# Altium PCB 带继电器产品.PcbDoc
Units mil, origin at the board's own origin, x right, y up, seen from the top; angles counter-clockwise.
Board outline 3149.61 x 2362.2 mil, 2 copper layers (Top Layer, Bottom Layer); 149 components, 188 nets, 574 pads, 127 vias.
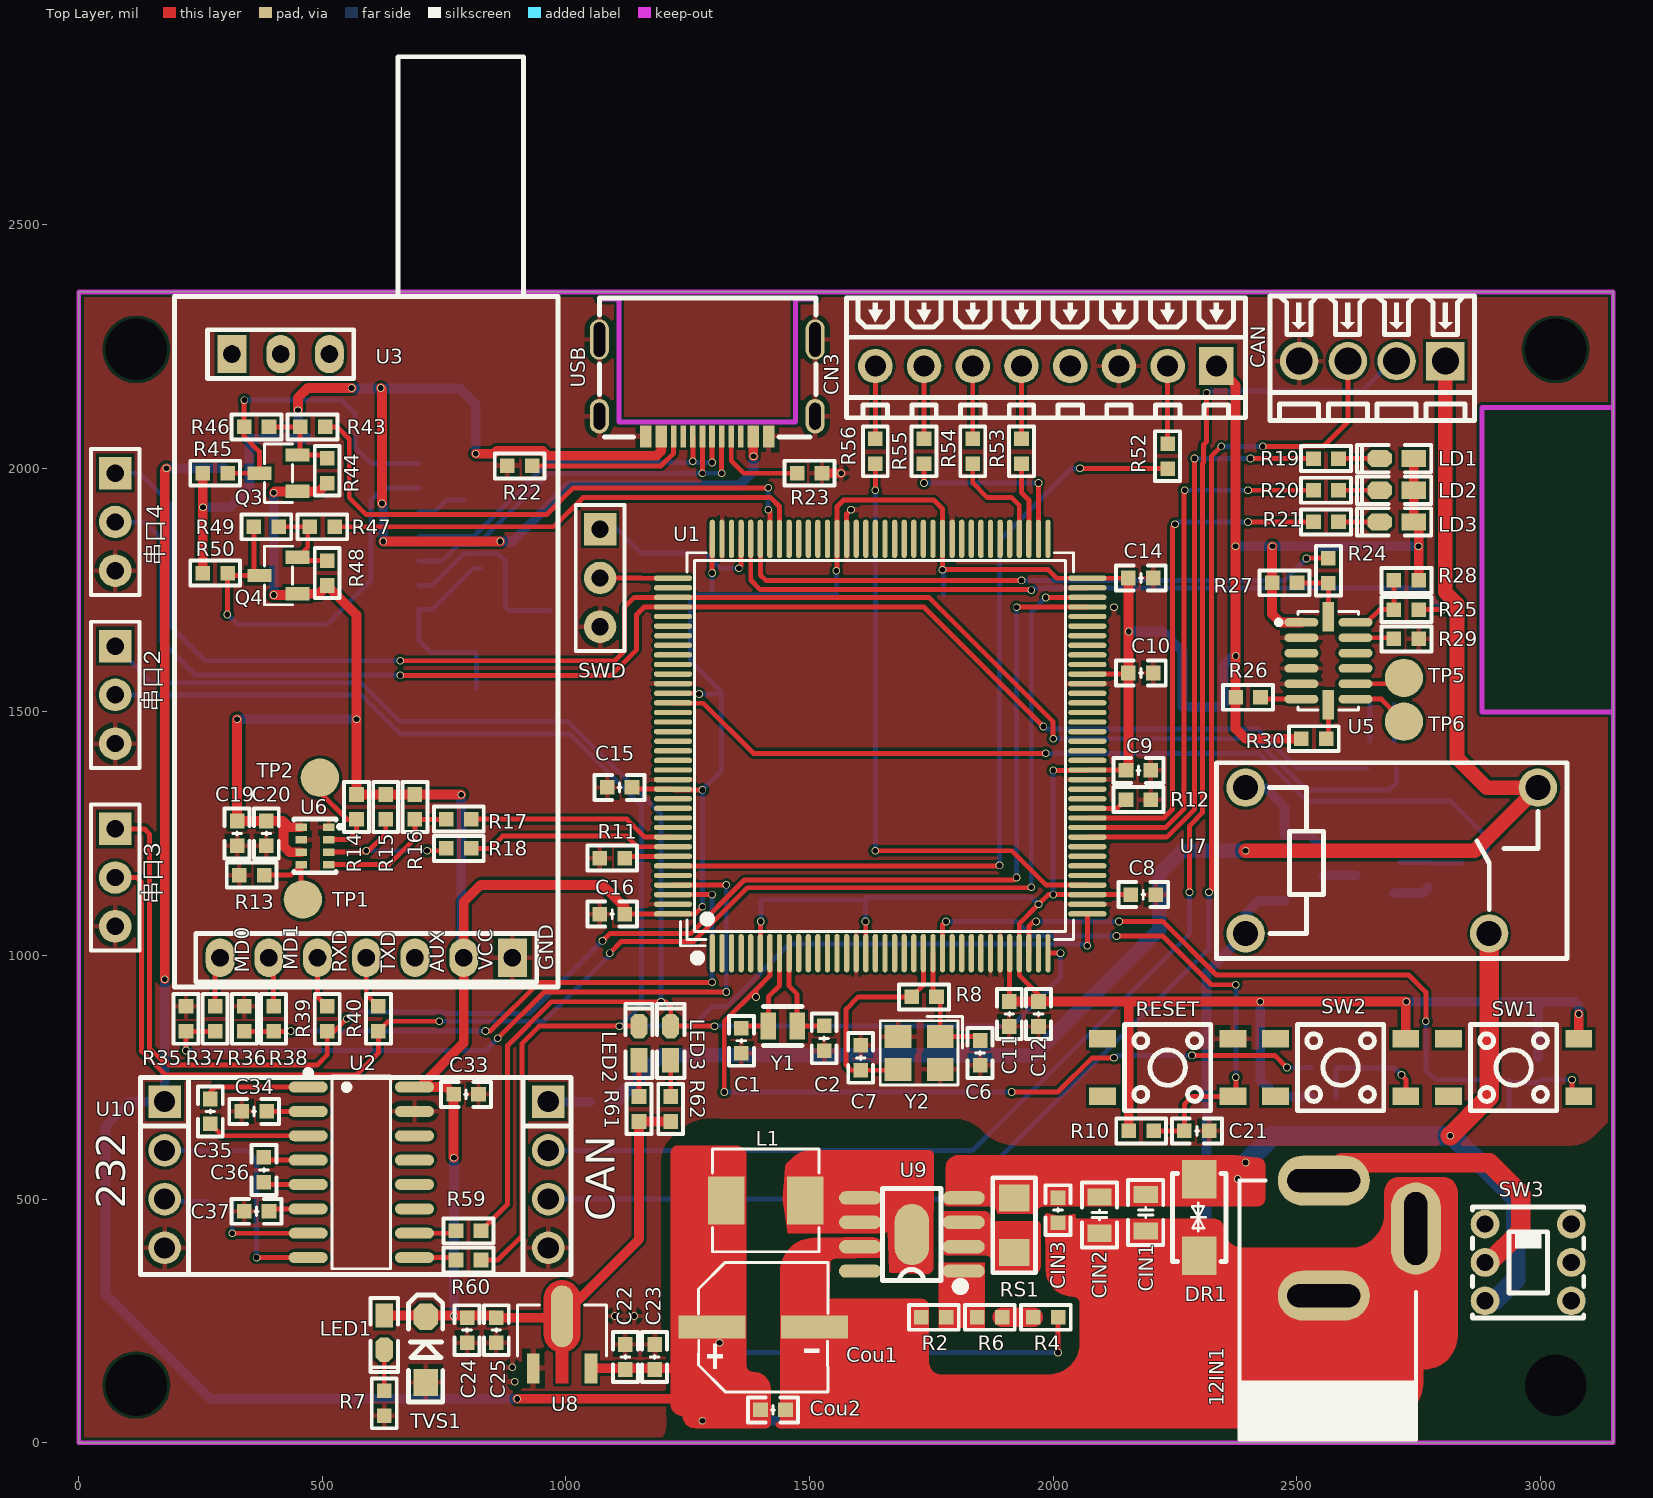
[diagram p0: Top Layer view]
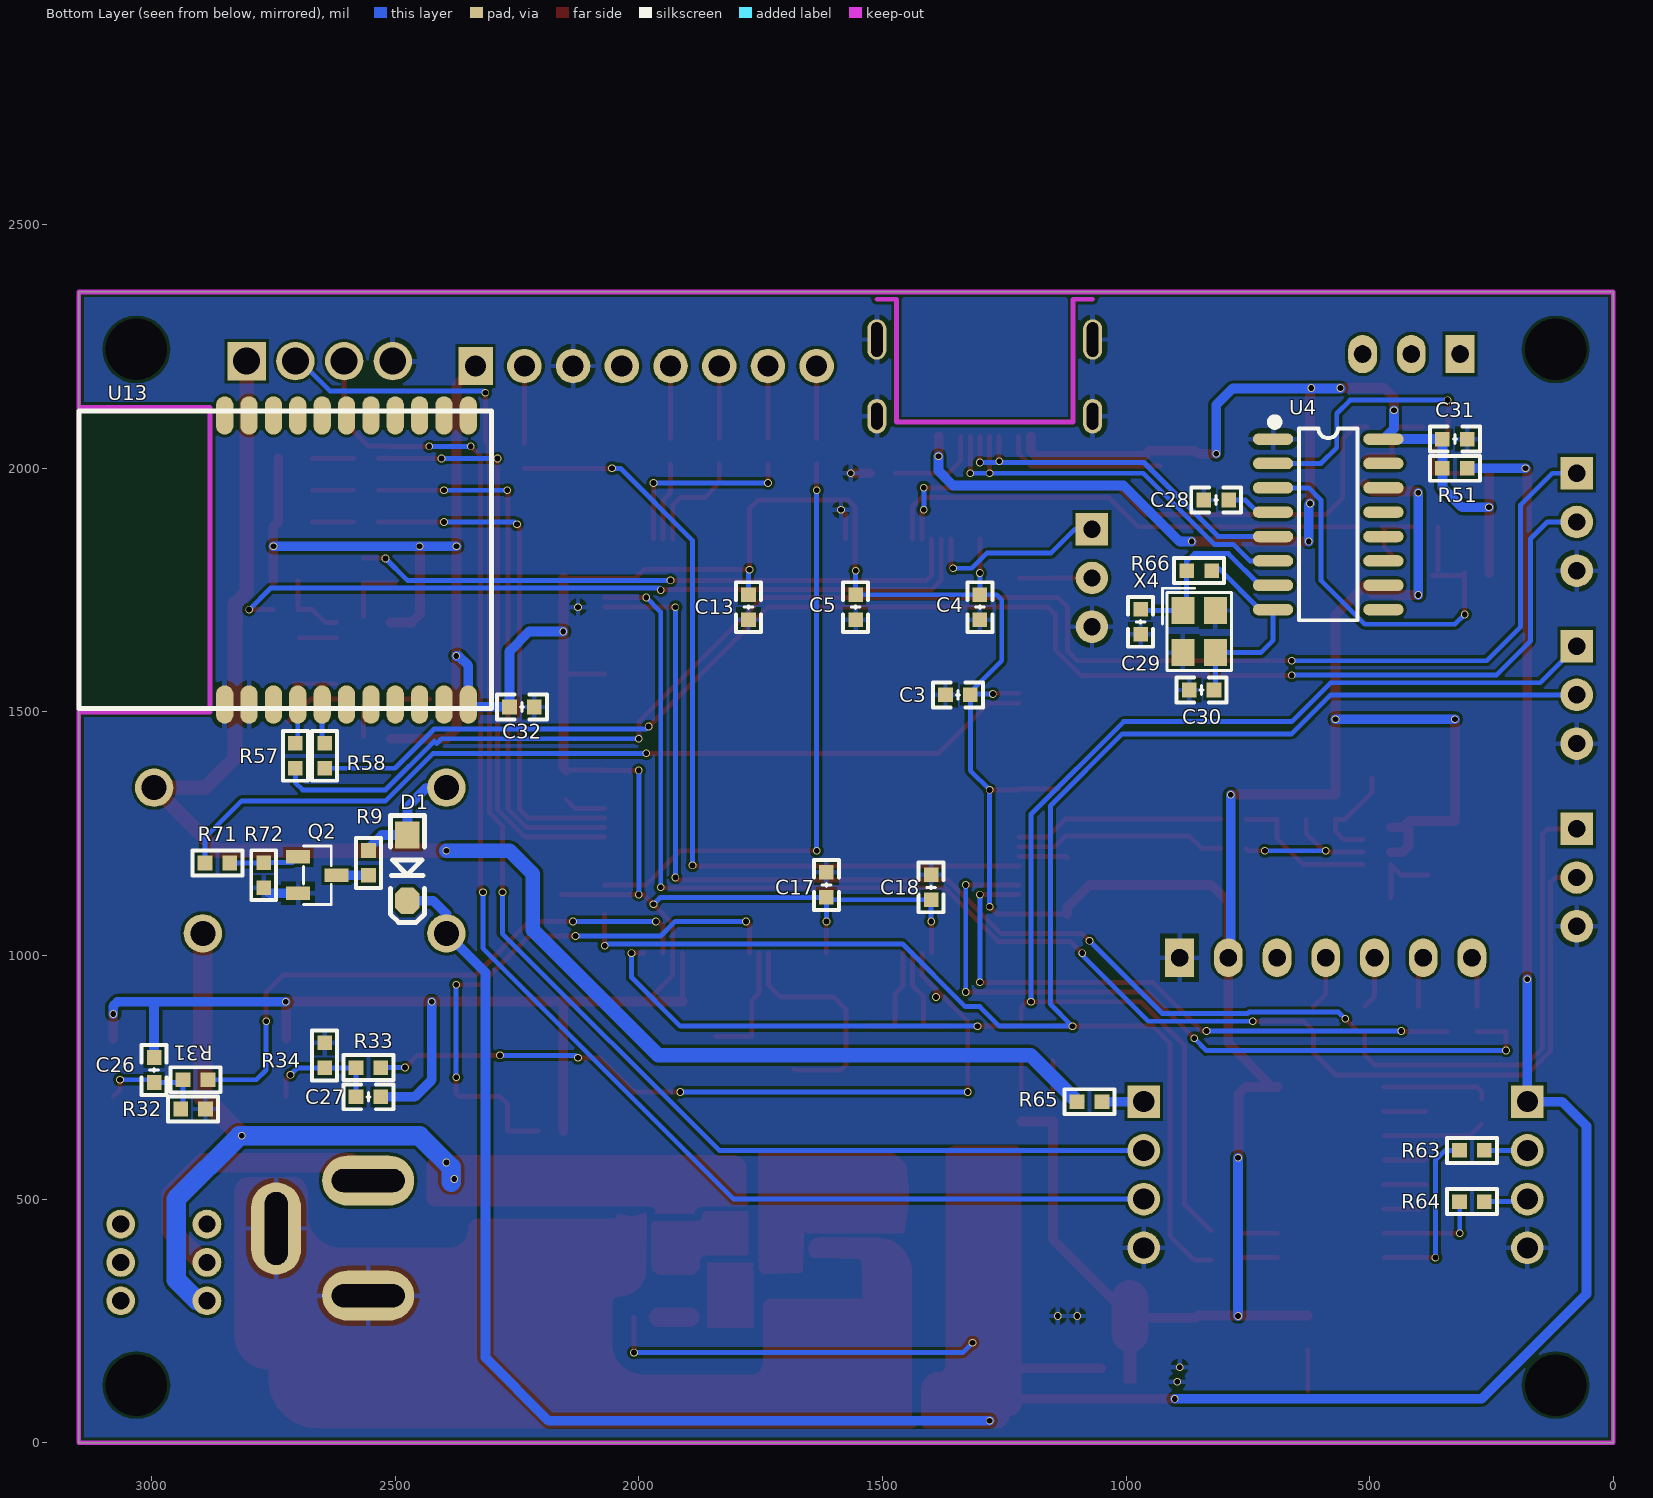
[diagram p1: Bottom Layer view, seen from below]

## Layer stack, top to bottom
Top Solder: solder mask 0.4, Solder Resist, Dk 3.5
Top Layer: signal copper 1.4
Dielectric 1: dielectric 12.6, FR-4, Dk 4.8
Bottom Layer: signal copper 1.4
Bottom Solder: solder mask 0.4, Solder Resist, Dk 3.5

## Board outline
0,0 3149.61,0 3149.61,2362.2 0,2362.2

## Design rules (kind name [scope] priority, off if disabled: settings)
Clearance [All] p1: gap=6
ComponentClearance [All] p1: gap=0 collisioncheckmode=3 verticalgap=0 showdistances=FALSE
PolygonConnect [All] p1: connectstyle=Relief reliefconductorwidth=10 reliefentries=4 polygonreliefangle="90 Angle" airgapwidth=10
RoutingVias [All] p1: holewidth=11.81 width=15.75 viastyle="Through Hole" minholewidth=11.81 minwidth=15.75 maxholewidth=11.81 maxwidth=15.75
SilkToSolderMaskClearance [IsPad] p1: minsilkscreentomaskgap=0 clearancetoexposedcopper=TRUE
SolderMaskExpansion [All] p1: expansion=4
Width [All] p1: maxlimit=40 minlimit=10 preferedwidth=10
27 further rules are at their usual default settings.

## Components (designator, comment, footprint, x,y, rotation, side; value= is the part's Value field where it differs from the comment)
12IN1 "HDR-1X3" DC-005 2650,420 r90 top
C1 "10P" C0603_L 1360,825 r90 top
C2 "10P" C0603_L 1530,830 r90 top
C3 "104" C0603_L 1345,1535 r180 bottom
C4 "10uF" C0603_L 1300,1715 r90 bottom
C5 "104" C0603_L 1555,1715 r90 bottom
C6 "22P" C0603_L 1850,800 r90 top
C7 "22P" C0603_L 1605,790 r270 top
C8 "104" C0603_L 2185,1125 r0 top
C9 "104" C0603_L 2175,1380 r0 top
C10 "104" C0603_L 2180,1580 r0 top
C11 "104" C0603_L 1910,880 r270 top
C12 "104" C0603_L 1970,880 r270 top
C13 "104" C0603_L 1775,1715 r270 bottom
C14 "104" C0603_L 2180,1775 r0 top
C15 "104" C0603_L 1110,1345 r180 top
C16 "104" C0603_L 1095,1085 r180 top
C17 "104" C0603_L 1615,1145 r90 bottom
C18 "104" C0603_L 1400,1140 r90 bottom
C19 "104" C0603_L 325,1250.59 r90 top
C20 "105" C0603_L 385,1250.59 r90 top
C21 "104" C0603_L 2295,640 r180 top
C22 "1uf" C0603_L 1122.01,175.99 r270 top
C23 "104" C0603_L 1182.01,175.99 r270 top
C24 "1uf" C0603_L 797.01,230.99 r90 top
C25 "104" C0603_L 857.01,230.99 r90 top
C26 "104" C0603_L 2995,765 r270 bottom
C27 "104" C0603_L 2555,710 r0 bottom
C28 "104" C0603_L 815,1935 r180 bottom
C29 "22p" C0603_L 970,1685 r90 bottom
C30 "22p" C0603_L 845,1545 r180 bottom
C31 "104" C0603_L 325,2060 r0 bottom
C32 "104" C0603_L 2240,1510 r180 bottom
C33 "0.22uf" C0603_L 795,715 r0 top
C34 "105" C0603_L 360,680 r0 top
C35 "0.22uf" C0603_L 270,680 r270 top
C36 "105" C0603_L 380,560 r270 top
C37 "105" C0603_L 365,475 r180 top
CAN "HDR-1X4" CAN/4P 2655,2220 r180 top
CIN1 "47uF/50VD6" C0805_L 2190,472.4 r270 top
CIN2 "47uF/50VD6" C0805_L 2095,467.4 r270 top
CIN3 "104" C0603_L 2010,477.4 r90 top
CN3 "SPI_RC522/C5188448" SPI/8P 1985,2210 r180 top
Cou1 "470uF/D6.3 L7.7/C2977552" D6.3/470uf 1405,237.4 r0 top
Cou2 "104" C0603_L 1425,67.4 r180 top
D1 "1n4148/sod123" SOD-123 2475,1180 r270 bottom
DR1 "SMAJ26CA/C7466479" TVS 2300,462.4 r270 top
L1 "68uH" 0530 1410,497.4 r0 top
LD1 "红色" LED0603_Y 2705,2020 r180 top
LD2 "红色" LED0603_Y 2705,1955 r180 top
LD3 "红色" LED0603_Y 2705,1890 r180 top
LED1 "红色" LED0603_Y 627.01,225.99 r270 top
LED2 "红色" LED0603_Y 1150,820 r90 top
LED3 "红色" LED0603_Y 1215,820 r90 top
Q2 "S9014" 9014 2660,1165 r0 bottom
Q3 "2N7002_C916396" 2N7002 410,1990 r0 top
Q4 "2N7002_C916396" 2N7002 410,1780 r0 top
R2 "10K" R0603_L 1755,257.4 r0 top
R4 "90K" R0603_L 1985,257.4 r0 top
R6 "90K" R0603_L 1870,257.4 r0 top
R7 "10K" R0603_L 627.01,80.99 r90 top
R8 "1M" R0603_L 1735,915 r180 top
R9 "510R" R0603_L 2555,1190 r270 bottom
R10 "10K" R0603_L 2180.59,640 r180 top
R11 "10K" R0603_L 1095,1200 r0 top
R12 "10K" R0603_L 2175,1320 r180 top
R13 "10K" R0603_L 355,1165 r0 top
R14 "10K" R0603_L 570,1305 r90 top
R15 "10K" R0603_L 630,1305 r90 top
R16 "10K" R0603_L 690,1305 r90 top
R17 "0R" R0603_L 780,1280 r180 top
R18 "0R" R0603_L 780,1220 r180 top
R19 "4.7K" R0603_L 2560,2020 r0 top
R20 "4.7K" R0603_L 2560,1955 r0 top
R21 "4.7K" R0603_L 2560,1890 r0 top
R22 "5.1K" R0603_L 905,2005 r0 top
R23 "5.1K" R0603_L 1500,1990 r0 top
R24 "0R" R0603_L 2565,1790 r270 top
R25 "0R" R0603_L 2725,1710 r180 top
R26 "0R" R0603_L 2400,1530 r180 top
R27 "10K" R0603_L 2475,1765 r180 top
R28 "10K" R0603_L 2725,1770 r0 top
R29 "0R" R0603_L 2725,1650 r180 top
R30 "10K" R0603_L 2535,1445 r180 top
R31 "1K" R0603_L 2910,745 r0 bottom
R32 "4.7K" R0603_L 2915,685 r0 bottom
R33 "1K" R0603_L 2555,770 r0 bottom
R34 "4.7K" R0603_L 2645,795 r270 bottom
R35 "10K" R0603_L 220,870 r90 top
R36 "10K" R0603_L 340,870 r90 top
R37 "0R" R0603_L 280,870 r90 top
R38 "0R" R0603_L 400,870 r90 top
R39 "0R" R0603_L 510,870 r90 top
R40 "0R" R0603_L 615,870 r90 top
R43 "0R" R0603_L 480,2085 r0 top
R44 "4.7k" R0603_L 510,1995 r270 top
R45 "4.7k" R0603_L 280,1990 r180 top
R46 "NC" R0603_L 365,2085 r0 top
R47 "0R" R0603_L 500,1880 r0 top
R48 "4.7k" R0603_L 510,1785 r270 top
R49 "NC" R0603_L 385,1880 r0 top
R50 "4.7k" R0603_L 280,1785 r180 top
R51 "NC/OR" R0603_L 325,2000 r180 bottom
R52 "0R" R0603_L 2235,2025 r270 top
R53 "0R" R0603_L 1935,2035 r270 top
R54 "0R" R0603_L 1835,2035 r270 top
R55 "0R" R0603_L 1735,2035 r270 top
R56 "0R" R0603_L 1635,2035 r270 top
R57 "0R" R0603_L 2705,1410 r90 bottom
R58 "0R" R0603_L 2645,1410 r90 bottom
R59 "0R" R0603_L 800,435 r180 top
R60 "0R" R0603_L 800,375 r180 top
R61 "4.7K" R0603_L 1150,685 r90 top
R62 "4.7K" R0603_L 1215,685 r90 top
R63 "0R" R0603_L 290,600 r180 bottom
R64 "0R" R0603_L 290,495 r180 bottom
R65 "0R" R0603_L 1075,700 r0 bottom
R66 "NC/1M" R0603_L 850,1790 r180 bottom
R71 "2K" R0603_L 2865,1190 r0 bottom
R72 "20K" R0603_L 2770,1165 r270 bottom
RESET "C963229" 按键4.5*4.5 2235,770 r180 top
RS1 "0.051R 2512" R1206_L 1920,447.4 r270 top
SW1 "C963229" 按键4.5*4.5 2945,770 r180 top
SW2 "C963229" 按键4.5*4.5 2590,770 r180 top
SW3 "PS-5850A-6PL/C963201" 电源开关 2975,370 r270 top
SWD "HDR-1X3" HDR2.54-LI-3P 1070,1775 r270 top
TP1 "SDO" 测试点 460,1115 r0 top
TP2 "CSB" 测试点 495,1365 r0 top
TP5 "IRQ" 测试点 2720,1570 r0 top
TP6 "IRQ" 测试点 2720,1480 r0 top
TVS1 "3.3V" SOD-123 712.01,190.99 r90 top
U1 "STM32F103ZET6" STME32F103ZET6 1645,1430 r0 top
U2 "SP3232EEN" max232 580,555 r270 top
U3 "无线通讯模块泽耀AS32-ttl-100-c" YAOZE 590,1615 r90 top
U4 "CH340G" SOP16_M 585,1885 r180 bottom
U5 "ADXL345BCCZ" ADXL345 2565,1605 r0 top
U6 "BMP280" BMP280 485,1225 r0 top
U7 "#NAME?" 继电器 2695,1195 r0 top
U8 "AMS1117-3.3V" 1117-3.3 992.01,205.99 r270 top
U9 "Component_1" H4025/9脚 1710,427.4 r180 top
U10 "232转CAN" CAN模块 570,550 r0 top
U13 "MK8000TR7" "MK8000 PCB_V1.0封装" 2350,1515 r90 bottom
USB "HC-TYPE-C-16P-C19274020" TYPEC 1290,2165 r180 top
X4 "12MHz/C9002/SMD3225" SMD3225 850,1665 r270 bottom
Y1 "32.768K/ C403709/SMD2012/2P" 32.768K 1445,855 r0 top
Y2 "8MHz/C2682774/SMD3225" SMD3225 1725,800 r180 top
串口2 "HDR-1X3" HDR2.54-LI-3P 74.94,1535 r270 top
串口3 "HDR-1X3" HDR2.54-LI-3P 74.94,1160 r270 top
串口4 "HDR-1X3" HDR2.54-LI-3P 74.94,1890 r270 top

## Footprints (in the part's own frame and the unit in brackets; to place one, negate y for a bottom-side part, rotate by r counter-clockwise, add the part's x,y. Pads: shape width x height; smd on the part's side, far side on the other; paste and mask are expansions set on the pad)
2N7002 [mm]
  rect 1.25x0.7 smd: 1(1,-0.95) 2(1,0.95) 3(-1,0)
  silkscreen extent -0.73,-1.53 0.73,1.53
32.768K [mm]
  rect 0.8x1.4 smd: 1(-0.75,0) 2(0.75,0)
  silkscreen extent -1.02,-1.02 1.02,1.02
0530 [mm]
  rect 1.9x2.5 smd mask+0.051: 1(2.05,0) 2(-2.05,0)
  silkscreen extent -2.78,-2.68 2.78,2.68
1117-3.3 [mm]
  rect 1.575x0.672 smd: 1(1.356,-1.5) 3(1.356,1.5)
  oval 3.226x1.14 smd: 2(-1.356,0)
  Top Layer region: -2.283,0.95 -0.429,0.95 -0.384,0.949 -0.34,0.946 -0.296,0.94 -0.252,0.933 -0.208,0.924 -0.165,0.912 -0.123,0.899 -0.081,0.884 -0.04,0.866 0,0.847 0.04,0.826 0.078,0.803 0.115,0.779 0.151,0.752 0.185,0.724 0.219,0.695 0.251,0.664 0.281,0.631 0.31,0.597 0.337,0.562 0.362,0.525 0.386,0.488 0.408,0.449 0.428,0.409 0.447,0.33 2.144,0.33 2.144,-0.33 0.447,-0.33 0.428,-0.409 0.408,-0.449 0.386,-0.488 0.362,-0.526 0.337,-0.562 0.31,-0.597 0.281,-0.631 0.251,-0.664 0.219,-0.695 0.185,-0.725 0.151,-0.753 0.115,-0.779 0.078,-0.804 0.04,-0.827 0,-0.848 -0.04,-0.867 -0.081,-0.884 -0.123,-0.899 -0.165,-0.913 -0.208,-0.924 -0.252,-0.934 -0.296,-0.941 -0.34,-0.946 -0.384,-0.949 -0.429,-0.95 -2.283,-0.95 -2.328,-0.949 -2.372,-0.946 -2.416,-0.941 -2.46,-0.934 -2.504,-0.924 -2.547,-0.913 -2.589,-0.899 -2.631,-0.884 -2.672,-0.867 -2.713,-0.848 -2.752,-0.827 -2.79,-0.804 -2.827,-0.779 -2.863,-0.753 -2.898,-0.725 -2.931,-0.695 -2.963,-0.664 -2.993,-0.631 -3.022,-0.597 -3.049,-0.562 -3.075,-0.526 -3.098,-0.488 -3.12,-0.449 -3.141,-0.409 -3.159,-0.369 -3.175,-0.327 -3.189,-0.285 -3.202,-0.242 -3.212,-0.199 -3.22,-0.155 -3.227,-0.111 -3.231,-0.067 -3.233,-0.022 -3.233,0.022 -3.231,0.067 -3.227,0.111 -3.22,0.155 -3.212,0.199 -3.202,0.242 -3.189,0.285 -3.175,0.327 -3.159,0.369 -3.141,0.409 -3.12,0.449 -3.098,0.488 -3.075,0.525 -3.049,0.562 -3.022,0.597 -2.993,0.631 -2.963,0.664 -2.931,0.695 -2.898,0.724 -2.863,0.752 -2.827,0.779 -2.79,0.803 -2.752,0.826 -2.713,0.847 -2.672,0.866 -2.631,0.884 -2.589,0.899 -2.547,0.912 -2.504,0.924 -2.46,0.933 -2.416,0.94 -2.372,0.946 -2.328,0.949
  silkscreen extent -1.95,-2.33 0.7,2.33
9014 [mm]
  rect 1.25x0.7 smd: 1(1,-0.95) 2(1,0.95) 3(-1,0)
  silkscreen extent -0.73,-1.53 0.73,1.53
ADXL345 [mm]
  oval 1.769x0.448 smd: 1(-1.409,2) 2(-1.409,1.2) 3(-1.409,0.4) 4(-1.409,-0.4) 5(-1.409,-1.2) 6(-1.409,-2) 8(1.409,-2) 9(1.409,-1.2) 10(1.409,-0.4) 11(1.409,0.4) 12(1.409,1.2) 13(1.409,2)
  rect 0.6x1.545 smd: 7(0,-2.297) 14(0,2.297)
  silkscreen extent -2.72,-2.58 1.58,2.58
BMP280 [mm]
  rect 0.6x0.4 smd: 1(0.725,0.975) 2(0.725,0.325) 3(0.725,-0.325) 4(0.725,-0.975) 5(-0.725,-0.975) 6(-0.725,-0.325) 7(-0.725,0.325) 8(-0.725,0.975)
  silkscreen extent -1.1,-1.4 1.4,1.4
C0603_L [mil] "无极性贴片电容"
  rect 30x30 smd: 1(-25.59,0) 2(25.59,0)
  silkscreen extent -51,-26 51,26, body extent -31,-16 31,16, height 32
C0805_L [mil] "无极性贴片电容"
  rect 35x50 smd: 1(-37.4,0) 2(37.4,0)
  silkscreen extent -67,-36 67,36, body extent -39,-24 39,24, height 20
CAN/4P [mm]
  rect 2x2 hole 1.4: 1(-3.81,0)
  round 2 hole 1.4: 2(-1.27,0) 3(1.27,0) 4(3.81,0)
  silkscreen extent -5.33,-3.4 5.33,3.1
CAN模块 [mm]
  rect 1.7x1.7 hole 1.1: 1(-10,3.81) 8(10,3.81)
  round 1.7 hole 1.1: 2(-10,1.27) 3(-10,-1.27) 4(-10,-3.81) 5(10,-3.81) 6(10,-1.27) 7(10,1.27)
  silkscreen extent -11.25,-5.21 11.19,5.08
D6.3/470uf [mm]
  rect 3.5x1.2 smd: 1(-2.67,0) 2(2.67,0)
  silkscreen extent -3.38,-3.38 3.38,3.38
DC-005 [mm] "J DC-005电源插座 封装规格:14.2X8.8mm"
  oval 2.6x4.8 hole 1.2 slot 3.8 at 90 deg: 1(3,2.4) 2(-3,2.4)
  oval 4.8x2.6 hole 1.2 slot 3.8 at 0 deg: 3(0.5,-2.4)
  silkscreen extent -10.5,-2.4 3,6.8, body extent -10.5,-2.4 3.55,6.9, height 11.2
H4025/9脚 [mm]
  oval 2.2x0.7 smd: 1(-2.7,1.905) 2(-2.7,0.635) 3(-2.7,-0.635) 4(-2.7,-1.905) 5(2.7,-1.905) 6(2.7,-0.635) 7(2.7,0.635) 8(2.7,1.905)
  oval 1.8x3.2 smd: 9(0,0)
  silkscreen extent -2.73,-2.4 1.54,2.91, body extent -3.1,-2.5 3.1,2.5, height 1.75
HDR2.54-LI-3P [mm] "排针，3脚"
  rect 1.7x1.7 hole 0.9: 1(-2.54,0)
  round 1.7 hole 0.9: 2(0,0) 3(2.54,0)
  silkscreen extent -3.81,-1.27 3.81,1.27, body extent -3.81,-1.27 3.81,1.27, height 8.5
LED0603_Y [mil] "黄色0603LED                              淘宝ID:黄晶宝石"
  rect 50x35 smd: 1(-35,0)
  oct 50x35 smd: 2(35,0)
  silkscreen extent -71,-28 81,28, body extent -32,-16 31,16, height 18
max232 [mil]
  oval 22.6x80.24 smd: 1(-175,-109.02) 2(-125,-109.02) 3(-75,-109.02) 4(-25,-109.02) 5(25,-109.02) 6(75,-109.02) 7(125,-109.02) 8(175,-109.02) 9(175,109.02) 10(125,109.02) 11(75,109.02) 12(25,109.02) 13(-25,109.02) 14(-75,109.02) 15(-125,109.02) 16(-175,109.02)
  silkscreen extent -210,-115 198,60
"MK8000 PCB_V1.0封装" [mm]
  oval 2x0.9 smd: 1(0,12.7) 2(0,11.43) 3(0,10.16) 4(0,8.89) 5(0,7.62) 6(0,6.35) 7(0,5.08) 8(0,3.81) 9(0,2.54) 10(0,1.27) 11(0,0) 12(15.075,0) 13(15.075,1.27) 14(15.075,2.54) 15(15.075,3.81) 16(15.075,5.08) 17(15.075,6.35) 18(15.075,7.62) 19(15.075,8.89) 20(15.075,10.16) 21(15.075,11.43) 22(15.075,12.7)
  silkscreen extent -0.2,-1.2 15.3,20.3
R0603_L [mil] "1/10W贴片电阻                 淘宝ID:黄晶宝石"
  rect 30x30 smd: 1(-25.59,0) 2(25.59,0)
  silkscreen extent -51,-26 51,26, body extent -31,-16 31,16, height 16
R1206_L [mil] "1/4W贴片电阻"
  rect 55x62 smd: 1(-55.12,0) 2(57.09,0)
  silkscreen extent -96,-44 98,44, body extent -63,-31 63,32, height 22
SMD3225 [mm]
  rect 1.4x1.2 smd: 1(-1.1,-0.85) 2(1.1,-0.85) 3(1.1,0.85) 4(-1.1,0.85)
  silkscreen extent -2.26,-1.91 2.03,1.68
SOD-123 [mil] "2.7x1.6X1.1mm（长宽高，不包括引脚） 淘宝ID:黄晶宝石"
  rect 55x50 smd: 1(-67.5,0)
  oct 55x50 smd: 2(67.5,0)
  silkscreen extent -108,-35 112,35, body extent -73,-31 73,31, height 48
SOP16_M [mm] "10.3*6.2*1.8mm（长宽高）封装库来自淘宝卖家 ID：黄晶宝石"
  oval 2.1x0.6 smd: 1(-2.875,4.445) 2(-2.875,3.175) 3(-2.875,1.905) 4(-2.875,0.635) 5(-2.875,-0.635) 6(-2.875,-1.905) 7(-2.875,-3.175) 8(-2.875,-4.445) 9(2.875,-4.445) 10(2.875,-3.175) 11(2.875,-1.905) 12(2.875,-0.635) 13(2.875,0.635) 14(2.875,1.905) 15(2.875,3.175) 16(2.875,4.445)
  silkscreen extent -2.95,-5 1.52,5.49, body extent -3,-5 3,5, height 1.9
SPI/8P [mm]
  rect 1.8x2 hole 1.1 paste+0 mask+0.05: 1(-8.89,0)
  round 1.8 hole 1.1 paste+0 mask+0.05: 2(-6.35,0) 3(-3.81,0) 4(-1.27,0) 5(1.27,0) 6(3.81,0) 7(6.35,0) 8(8.89,0)
  silkscreen extent -10.4,-3.56 10.4,2.7
STME32F103ZET6 [mm]
  oval 0.28x2 smd: 1(-8.75,-10.8) 2(-8.25,-10.8) 3(-7.75,-10.8) 4(-7.25,-10.8) 5(-6.75,-10.8) 6(-6.25,-10.8) 7(-5.75,-10.8) 8(-5.25,-10.8) 9(-4.75,-10.8) 10(-4.25,-10.8) 11(-3.75,-10.8) 12(-3.25,-10.8) 13(-2.75,-10.8) 14(-2.25,-10.8) 15(-1.75,-10.8) 16(-1.25,-10.8) 17(-0.75,-10.8) 18(-0.25,-10.8) 19(0.25,-10.8) 20(0.75,-10.8) 21(1.25,-10.8) 22(1.75,-10.8) 23(2.25,-10.8) 24(2.75,-10.8) 25(3.25,-10.8) 26(3.75,-10.8) 27(4.25,-10.8) 28(4.75,-10.8) 29(5.25,-10.8) 30(5.75,-10.8) 31(6.25,-10.8) 32(6.75,-10.8) 33(7.25,-10.8) 34(7.75,-10.8) 35(8.25,-10.8) 36(8.75,-10.8) 73(8.75,10.8) 74(8.25,10.8) 75(7.75,10.8) 76(7.25,10.8) 77(6.75,10.8) 78(6.25,10.8) 79(5.75,10.8) 80(5.25,10.8) 81(4.75,10.8) 82(4.25,10.8) 83(3.75,10.8) 84(3.25,10.8) 85(2.75,10.8) 86(2.25,10.8) 87(1.75,10.8) 88(1.25,10.8) 89(0.75,10.8) 90(0.25,10.8) 91(-0.25,10.8) 92(-0.75,10.8) 93(-1.25,10.8) 94(-1.75,10.8) 95(-2.25,10.8) 96(-2.75,10.8) 97(-3.25,10.8) 98(-3.75,10.8) 99(-4.25,10.8) 100(-4.75,10.8) 101(-5.25,10.8) 102(-5.75,10.8) 103(-6.25,10.8) 104(-6.75,10.8) 105(-7.25,10.8) 106(-7.75,10.8) 107(-8.25,10.8) 108(-8.75,10.8)
  oval 2x0.28 smd: 37(10.8,-8.75) 38(10.8,-8.25) 39(10.8,-7.75) 40(10.8,-7.25) 41(10.8,-6.75) 42(10.8,-6.25) 43(10.8,-5.75) 44(10.8,-5.25) 45(10.8,-4.75) 46(10.8,-4.25) 47(10.8,-3.75) 48(10.8,-3.25) 49(10.8,-2.75) 50(10.8,-2.25) 51(10.8,-1.75) 52(10.8,-1.25) 53(10.8,-0.75) 54(10.8,-0.25) 55(10.8,0.25) 56(10.8,0.75) 57(10.8,1.25) 58(10.8,1.75) 59(10.8,2.25) 60(10.8,2.75) 61(10.8,3.25) 62(10.8,3.75) 63(10.8,4.25) 64(10.8,4.75) 65(10.8,5.25) 66(10.8,5.75) 67(10.8,6.25) 68(10.8,6.75) 69(10.8,7.25) 70(10.8,7.75) 71(10.8,8.25) 72(10.8,8.75) 109(-10.8,8.75) 110(-10.8,8.25) 111(-10.8,7.75) 112(-10.8,7.25) 113(-10.8,6.75) 114(-10.8,6.25) 115(-10.8,5.75) 116(-10.8,5.25) 117(-10.8,4.75) 118(-10.8,4.25) 119(-10.8,3.75) 120(-10.8,3.25) 121(-10.8,2.75) 122(-10.8,2.25) 123(-10.8,1.75) 124(-10.8,1.25) 125(-10.8,0.75) 126(-10.8,0.25) 127(-10.8,-0.25) 128(-10.8,-0.75) 129(-10.8,-1.25) 130(-10.8,-1.75) 131(-10.8,-2.25) 132(-10.8,-2.75) 133(-10.8,-3.25) 134(-10.8,-3.75) 135(-10.8,-4.25) 136(-10.8,-4.75) 137(-10.8,-5.25) 138(-10.8,-5.75) 139(-10.8,-6.25) 140(-10.8,-6.75) 141(-10.8,-7.25) 142(-10.8,-7.75) 143(-10.8,-8.25) 144(-10.8,-8.75)
  silkscreen extent -10.41,-11.25 10.08,10.08
TVS [mm]
  rect 2x1.8 smd: 1(-2,0) 2(2,0)
  silkscreen extent -2.3,-1.4 2.3,1.4
TYPEC [mm]
  oval 1x1.8 hole 0.6 slot 1.4 at 90 deg: 12(-5.625,1.475)
  oval 1x1.8 hole 0.6 slot 1.4 at 90 deg copper offset 0,0: 13(5.625,1.475)
  oval 1x2.1 hole 0.6 slot 1.8 at 90 deg: 14(-5.625,-2.525)
  oval 1x2.1 hole 0.6 slot 1.8 at 90 deg copper offset 0,0: 15(5.625,-2.525)
  rect 0.6x1.15 smd paste+0 mask+0.05: A1B12(-3.2,2.525) A4B9(-2.4,2.525) A9B4(2.4,2.525) A12B1(3.2,2.525)
  rect 0.3x1.15 smd paste+0 mask+0.05: A5(-1.25,2.525) A6(-0.25,2.525) A7(0.25,2.525) A8(1.25,2.525) B5(1.75,2.525) B6(0.75,2.525) B7(-0.75,2.525) B8(-1.75,2.525)
  Keep-Out Layer lines w0.254: 4.6,-1.397 4.6,1.778 4.6,-1.397 ; 4.6,-1.397 4.6,-4.625 ; 4.6,-1.397 4.6,-4.625 ; 4.6,-4.625 5.625,-4.625 4.6,-4.625 ; -4.6,1.778 -4.6,-1.494 -4.6,1.778 ; -4.6,1.778 4.572,1.778 -4.6,1.778 ; -4.6,-4.625 -4.6,-1.397 -4.6,-4.625 ; -4.6,-4.625 -5.625,-4.625 -4.6,-4.625
  silkscreen extent -5.68,-4.68 5.62,2.55
YAOZE [mm]
  rect 2x1.5 hole 0.9 slot 0.905 at 0 deg: 1(-15.736,-7.62) 10(15.736,7)
  oval 2x1.5 hole 0.9 slot 0.905 at 0 deg: 2(-15.736,-5.08) 3(-15.736,-2.54) 4(-15.736,0) 5(-15.736,2.54) 6(-15.736,5.08) 7(-15.736,7.62) 8(15.736,1.92) 9(15.736,4.46)
  silkscreen extent -17.26,-10 31.24,10
按键4.5*4.5 [mm]
  rect 1.4x0.9 smd: 1(-3.4,1.5) 2(3.4,1.5) 3(-3.4,-1.5) 4(3.4,-1.5)
  silkscreen extent -2.25,-2.25 2.25,2.25
测试点 [mm]
  round 2 smd: 1(0,0)
电源开关 [mm]
  round 1.5 hole 0.9 paste+0 mask+0.05: 1(-2,-2.25) 2(0,-2.25) 3(2,-2.25) 4(-2,2.25) 5(0,2.25) 6(2,2.25)
  silkscreen extent -2.9,-2.9 2.9,2.9
继电器 [mm]
  round 2 hole 1.3: 1(-7.62,3.8) 3(7.62,3.8) 4(5.08,-3.8) 5(-7.62,-3.8)
  silkscreen extent -9.14,-5.1 9.14,5.1

## Part data
12IN1 SWD 串口2 串口3 串口4: library part "Header 3", "3P接插件"
C1 C2 C3 C4 C5 C6 C7 C8 C9 C10 C11 C12 C13 C14 C15 C16 C17 C18 C19 C20 C21: library part C
C22 C23 C24 C25 C26 C27 C28 C29 C30 C31 C32: library part C, "无极性贴片电容"
C33 C34 C35 C36 C37: library part CAP, "Capacitor"
CAN: library part "Header 4", "4P接插件"
CIN1 CIN2 Cou1: library part CE, "直插电解电容"
CIN3 Cou2: library part C, "贴片电容"
CN3: library part SPI_RC522
D1: library part 1N4007, "整流二极管"
DR1: library part DR, "瞬态电压抑制二极管"
L1: library part L, "小功率贴片电感"
LD1 LD2 LD3 LED1 LED2 LED3: library part LED-SMD, "贴片LED"
Q2: library part S9014_C2148
R2 R4 R6 R7 R9 R19 R20 R21 R22 R23 R31 R32 R33 R34 R43 R44 R45 R46 R47 R48 R49 R50 R51 R63 R64 R65 R66 RS1: library part R, "贴片电阻"
R8 R10 R11 R12 R13 R14 R15 R16 R17 R18 R59 R60 R61 R62 R71 R72: library part R
R24 R25 R26 R27 R28 R29 R30 R35 R36 R37 R38 R39 R40 R52 R53 R54 R55 R56 R57 R58: library part RES2
RESET SW1 SW2: library part KH-6X6X15H-TJ-FS
SW3: library part PS-5850A-6PL
TP1 TP2 TP5 TP6: library part "TEST TP", "测试环"
TVS1: library part 1N4102, "8.7V/0.5W稳压管"
U3 U10: library part Component_1
U4: "串口转USB"
U7: library part YX201-S-105DM
U8: library part AMS1117, "三端稳压芯片"
USB: library part HC-TYPE-C-16P-C08B
X4 Y2: library part X32258MSB4SI
Y1: library part XTAL_1, "Crystal Oscillator"

## Free pads (board coordinates)
  round 60 hole 125.98: 0(118.11,118.11) 0(118.11,2244.09) 0(3031.5,118.11) 0(3031.5,2244.09)

## Via types
v1: diameter 15.75, hole 11.81, Top Layer to Bottom Layer, 127 vias

## Nets (pads, with @x,y where several pads share a name; then routed paths per layer and width w, separated by ;. In a path a pad name is that pad's centre, name@x,y a point inside that pad or via, vN(x,y) a via of type N, cw(c..) or ccw(c..) an arc to the next point about the centre after c; other vN are vias at no path point)
5V: C22.2 C23.2 Cou1.1 Cou2.2 D1.2 L1.2 R4.2 R51.2 U7.5 U8.3 U10.1 | length 6419
  Top Layer w10: Cou1.1@1299.89,220.11 v1(1315,205) ; v1(2010,185) 2010,256.8 R4.2
  Top Layer w20: v1(176.3,951.3) 176.3,1996.3 v1(180,2000) ; v1(900,90) 1265,90 ; U8.3 1227.6,152.6 1299.89,224.89 Cou1.1
  Bottom Layer w10: v1(1315,205) 1335,185 v1(2010,185)
  Bottom Layer w20: v1(176.3,951.3) U10.1 105,700 55,650 55,305 270,90 v1(900,90) ; v1(180,2000) R51.2 ; v1(1280,45) 2185,45 2315,175 2315,965.4 U7.5 2395,1085 2422.5,1112.5 D1.2
12V_OUT: CAN.1 R65.2 U7.3 | length 3244.2
  Top Layer w30: v1(2395,1215) 2865.4,1215 U7.3 2890.4,1344.6 2828.87,1406.13 2828.87,1721.96 2805,1745.83 CAN.1
  Bottom Layer w30: R65.2 1195.58,795 1960,795 2217.5,1052.5 2217.5,1167.5 2265,1215 v1(2395,1215)
BOOT0: R11.2 U1.138 | length 100.7
  Top Layer w10: R11.2 1124.21,1203.62 U1.138
BOOT1: R12.2 U1.48 | length 86.6
  Top Layer w10: U1.48 2131.46,1302.05 R12.2
CANH: CAN.2 U10.7 | length 3042
  Top Layer w10: v1(2280,1130) 2280,1266 2295,1281 2295,1282.12 2306.25,1293.37 2306.25,2009.56 2308.87,2012.18 2308.87,2048.87 2315,2055 v1(2315,2155)
  Bottom Layer w10: U10.7 1835,600 2280,1045 v1(2280,1130) ; v1(2315,2155) 2318.87,2158.87 2634.23,2158.87 2695.36,2220 CAN.2
CANL: CAN.3 U10.6 | length 3015.7
  Top Layer w10: v1(2320,1130) 2324.87,1134.87 2324.87,2024.87 v1(2345,2045) ; v1(2430,2045) 2513.85,2045 2514.85,2046 2556,2046 2605,2095 CAN.3
  Bottom Layer w10: U10.6 1805,500 2320,1015 v1(2320,1130) ; v1(2345,2045) v1(2430,2045)
CSB: R14.1 TP2.1 U6.2 | length 216
  Top Layer w10: TP2.1 495,1335 550.59,1279.41 R14.1 570,1255 552.79,1237.79 U6.2
D+: U4.5 USB.A6 USB.B6 | length 773.4
  Top Layer w10: v1(1260.47,2014.53) USB.B6 ; USB.A6 1299.84,2010.16 1300,2010 v1(1300,2011.92)
  Bottom Layer w10: U4.5 811.15,1860 963.08,2011.92 v1(1300,2011.92)
D-: U4.6 USB.A7 USB.B7 | length 847.8
  Top Layer w10: v1(1280,1990) 1280,2065.43 USB.A7 ; USB.B7 1319.53,2045.47 1319.53,1990.47 v1(1320,1990)
  Bottom Layer w10: U4.6 746,1810 780,1844 819,1844 965,1990 v1(1280,1990) v1(1320,1990)
FIFO_RCLK: U1.134
FIFO_WEN: U1.133
GBC_KEY: R56.2 U1.40 | length 1258.8
  Top Layer w10: v1(1635,1215) 1915,1215 1985.43,1144.57 U1.40 ; v1(1635,1955) R56.2
  Bottom Layer w10: v1(1635,1215) v1(1635,1955)
GBC_LED: U1.110
GBC_RX: R39.1 U1.69 串口3.1 | length 3199.3
  Top Layer w10: 串口3.1 135,1260 145,1250 145,810 170,785 176,785 186,775 489,775 510,796 R39.1 524.41,844.41 v1(550,870) ; v1(1075,1030) 1090,1045 1255.83,1045 1365.83,1155 1920,1155 v1(1925,1160) ; v1(1925,1715) 2069.77,1715 U1.69
  Bottom Layer w10: v1(550,870) 563.87,883.87 747.82,883.87 750.69,881 926,881 v1(1075,1030) ; v1(1925,1160) v1(1925,1715)
GBC_TX: R40.1 U1.70 串口3.2 | length 3137
  Top Layer w10: 串口3.2 119,1160 129,1150 129,803.37 177.37,755 570,755 615,800 R40.1 635.6,865 v1(740,865) ; v1(1090,1005) 1114,1029 1262.46,1029 1372.46,1139 1954,1139 v1(1955,1140) ; v1(1985,1735) 2070.08,1735 U1.70
  Bottom Layer w10: v1(740,865) 954,865 1094,1005 v1(1090,1005) ; v1(1955,1140) 1955,1705 v1(1985,1735)
GND: 12IN1.2 12IN1.3 C1.1 C2.1 C3.1 C4.1 C5.1 C6.1 C7.1 C8.2 C9.2 C10.2 C11.2 C12.2 C13.2 C14.2 C15.2 C16.2 C17.2 C18.2 C19.1 C20.1 C21.1 C22.1 C23.1 C24.1 C25.1 C28.1 C29.1 C30.1 C31.1 C32.2 C33.2 C34.1 C37.2 CAN.4 CIN1.2 CIN2.2 CIN3.1 CN3.3 Cou1.2 Cou2.1 DR1.2 Q2.2 R2.1 R7.1 R11.1 R12.1 R13.1 R22.1 R23.2 R29.1 R32.1 R34.1 R35.2 R36.2 R72.2 RESET.3 SWD.3 TVS1.1 U1.16 U1.30 U1.31 U1.38 U1.51 U1.61 U1.71 U1.83 U1.94 U1.107 U1.120 U1.130 U1.143 U2.15 U3.1 U4.1 U5.2 U5.4 U5.5 U6.1 U6.7 U8.1 U9.7 U10.4 U10.5 U13.1 U13.2 USB.12 USB.13 USB.14 USB.15 USB.A1B12 USB.A12B1 X4.2 X4.4 Y2.2 Y2.4 串口2.3 串口3.3 串口4.3 | length 178.4
  Top Layer w10: U1.94 1576.1,1906.1 v1(1585,1915)
  Top Layer w20: R23.2 v1(1565,1990)
  Bottom Layer w20: Q2.2 2758.19,1127.6 R72.2
  other v1: 895,125 890,155 1100,260 1140,260 2125,1715
IIC_SCL: R17.1 U1.136 | length 429.5
  Top Layer w10: R17.1 1125,1280 1162.01,1242.99 U1.136
IIC_SDA: R18.1 U1.137 | length 433.5
  Top Layer w10: R18.1 845,1220 870,1245 1125,1245 1146.69,1223.31 U1.137
INT1_345: TP6.1 U5.8 | length 118.7
  Top Layer w10: U5.8 2673.74,1526.26 TP6.1
INT2_345: TP5.1 U5.9 | length 87.3
  Top Layer w10: U5.9 TP5.1@2707.76,1557.76
LCD_BL: R20.1 U1.46 | length 1133.3
  Top Layer w10: U1.46 2230.31,1262.68 2268.87,1301.25 2268.87,1953.87 v1(2270,1955) ; v1(2400,1955) R20.1
  Bottom Layer w10: v1(2270,1955) v1(2400,1955)
LED0: U1.135
NetC1_2: C1.2 U1.8 Y1.1 | length 210.3
  Top Layer w10: C1.2@1364.42,855 Y1.1 1415.47,915.47 1438.31,938.31 U1.8
NetC2_2: C2.2 U1.9 Y1.2 | length 211.5
  Top Layer w10: U1.9 1457.99,937.01 1474.53,920.47 Y1.2 C2.2@1529.42,855
NetC6_2: C6.2 R8.1 U1.24 Y2.1 | length 251.4
  Top Layer w10: U1.24 1753.27,922.33 R8.1 1768.31,907.29 Y2.1 C6.2@1842.13,833.46
NetC7_2: C7.2 R8.2 U1.23 Y2.3 | length 471.5
  Top Layer w10: Y2.3 1679.57,764.41 C7.2 1585.59,764.41 1575,775 1575,890 1600,915 R8.2 1733.58,939.17 U1.23
NetC26_2: C26.2 R31.2 R32.2 SW1.1 | length 237.6
  Top Layer w10: v1(3065,745) 3065,724.81 SW1.1
  Bottom Layer w10: R32.2 cw(c2940.59,690) 2935.59,690 R31.2 ccw(c2941.18,745) 2941.18,739.41 C26.2 3000.59,745 v1(3065,745)
NetC27_2: C27.2 R33.2 R34.2 SW2.1 | length 248.1
  Top Layer w10: v1(2715,755) 2723.86,746.14 SW2.1
  Bottom Layer w10: C27.2 R33.2@2580.59,769.41 ; R33.2 R33.2@2580.59,769.41 ; v1(2715,755) 2700.59,769.41 R34.2 R33.2@2580.59,769.41
NetC28_2: C28.2 U4.4 | length 101.6
  Bottom Layer w10: U4.4 730,1910 755,1935 C28.2
NetC29_2: C29.2 R66.1 U4.7 X4.1 | length 399.4
  Bottom Layer w10: U4.7 725,1760 790,1825 860,1825 875.59,1809.41 R66.1 875.59,1716.18 X4.1 C29.2@967.72,1708.31
NetC30_2: C30.2 R66.2 U4.8 X4.3 | length 427.2
  Bottom Layer w10: C30.2@816.54,1547.87 X4.3 723.31,1621.69 698.19,1646.81 U4.8 725,1710 810,1795 R66.2@824.41,1795
NetC34_2: C34.2 U2.2 | length 85.4
  Top Layer w10: C34.2 U2.2
NetC35_1: C35.1 U2.1 | length 219.5
  Top Layer w10: C35.1 270,720 280,730 U2.1
NetC35_2: C35.2 U2.3 | length 211.1
  Top Layer w10: C35.2 294.41,630 U2.3
NetC36_1: C36.1 U2.4 | length 85.4
  Top Layer w10: C36.1@385.59,580 U2.4
NetC36_2: C36.2 U2.5 | length 86.6
  Top Layer w10: C36.2@384.41,530 U2.5
NetC37_1: C37.1 U2.6 | length 75.4
  Top Layer w10: C37.1@395.59,480 U2.6
NetCN3_2: CN3.2 R52.1 | length 159.4
  Top Layer w10: R52.1 CN3.2
NetCN3_5: CN3.5 R53.1 | length 149.4
  Top Layer w10: R53.1 CN3.5
NetCN3_6: CN3.6 R54.1 | length 149.4
  Top Layer w10: R54.1 CN3.6
NetCN3_7: CN3.7 R55.1 | length 149.4
  Top Layer w10: R55.1 CN3.7
NetCN3_8: CN3.8 R56.1 | length 149.4
  Top Layer w10: R56.1 CN3.8
NetD1_1: D1.1 R9.1 U7.1 | length 249.7
  Bottom Layer w20: U7.1 2435.4,1344.6 2475,1305 D1.1 2527.5,1247.5 2555,1220 R9.1
NetL1_1: L1.1 U9.5 U9.6 U9.9
NetLD1_2: LD1.2 R19.2 | length 84.4
  Top Layer w10: R19.2 LD1.2
NetLD2_2: LD2.2 R20.2 | length 84.4
  Top Layer w10: R20.2 LD2.2
NetLD3_2: LD3.2 R21.2 | length 84.4
  Top Layer w10: R21.2 LD3.2
NetLED1_2: LED1.2 R7.2 | length 84.4
  Top Layer w10: R7.2 LED1.2
NetLED2_1: LED2.1 R61.2 | length 74.4
  Top Layer w10: R61.2 LED2.1
NetLED3_1: LED3.1 R62.2 | length 74.4
  Top Layer w10: R62.2 LED3.1
NetQ2_1: Q2.1 R71.1 R72.1 | length 127.6
  Bottom Layer w10: Q2.1@2711.18,1190.59 R72.1 ; R72.1@2770.59,1190 R71.1
NetQ2_3: Q2.3 R9.2 | length 65.9
  Bottom Layer w20: R9.2 2555.59,1165 Q2.3
NetR2_2: R2.2 R6.1 U9.1
NetR4_1: R4.1 R6.2 | length 63.8
  Top Layer w40: R6.2 R4.1
NetR22_2: R22.2 USB.B5 | length 335.8
  Top Layer w10: R22.2 1195,2005 1221.11,2031.11 USB.B5
NetR23_1: R23.1 USB.A5 | length 195.7
  Top Layer w10: USB.A5 1339.22,2015.78 1365,1990 R23.1
NetR26_1: R26.1 U5.6 | length 80.2
  Top Layer w10: R26.1@2429.34,1526.26 U5.6
NetR30_1: R30.1 U5.7 | length 65.1
  Top Layer w10: R30.1@2565,1449.41 U5.7
NetR37_2: R37.2 U3.7 | length 104
  Top Layer w10: R37.2 280,985.48 U3.7
NetR38_2: R38.2 U3.6 | length 104
  Top Layer w10: U3.6 400,985.47 R38.2
NetR39_2: R39.2 U3.5 | length 108.2
  Top Layer w10: U3.5 490,915.59 R39.2
NetR40_2: R40.2 U3.4 | length 110.2
  Top Layer w10: U3.4 590,920.59 R40.2
NetR57_2: R57.2 U13.4 | length 74.4
  Bottom Layer w10: R57.2@2700,1440.58 U13.4
NetR58_2: R58.2 U13.5 | length 74.4
  Bottom Layer w10: R58.2@2650,1440.59 U13.5
NetR59_2: R59.2 U2.10 | length 80.4
  Top Layer w10: U2.10 R59.2@769.41,430
NetR60_2: R60.2 U2.9 | length 80.4
  Top Layer w10: U2.9 R60.2@769.42,380
NetR63_2: R63.2 U10.2 | length 88.1
  Bottom Layer w10: U10.2 R63.2
NetR64_2: R64.2 U10.3 | length 83.1
  Bottom Layer w10: U10.3@181.3,495 R64.2
NetR65_1: R65.1 U10.8 | length 85.7
  Bottom Layer w20: U10.8 R65.1
NetRS1_2: RS1.2 U9.2 U9.3
OV_VSYNC: U1.100
PA0: R31.1 U1.34 | length 1222
  Top Layer w10: U1.34 1950.12,1060.12 1960,1070 v1(1965,1070) ; v1(2135,1070) 2225,1070 2335,960 2730,960 2765,925 v1(2765,865)
  Bottom Layer w10: v1(1965,1070) v1(2135,1070) ; v1(2765,865) 2765,765 2785,745 R31.1
PA1: U1.35
PA2: LED3.2 R59.1 U1.36 串口2.1 | length 3376
  Top Layer w10: R59.1 880,489.41 880,815 970,905 v1(1195,905) 1205,905 1215,895 LED3.2@1215,870 ; LED3.2 v1(1305,855) ; U1.36 2014.8,1004.8 v1(2015,1005)
  Bottom Layer w10: 串口2.1@79.94,1640 串口2.1 149.94,1560 580,1560 660,1480 1005,1480 1195,1290 v1(1195,905) ; v1(1305,855) 1915,855 2015,955 v1(2015,1005)
PA3: LED2.2 R60.1 U1.37 串口2.2 | length 3497.1
  Top Layer w10: R60.1 860,375 910,425 910,820 945,855 LED2.2 ; v1(2070,1020) 2070.2,1020.2 U1.37
  Bottom Layer w10: 串口2.2 580,1535 660,1455 1007.37,1455 1155,1307.37 1155,900 v1(1110,855) 1260,855 1300,895 1330,895 1458.87,1023.87 2066.13,1023.87 v1(2070,1020)
PA5: U1.41
PA6: U1.42
PA7: U1.43
PA9: R47.2 U1.101 | length 1011.7
  Top Layer w10: R47.2 975,1880 1035,1940 1420,1940 1438.31,1921.69 U1.101
PA10: R43.2 U1.102 | length 1183.6
  Top Layer w10: R43.2 530.5,2085 555.25,2060.25 555.25,1939.75 590,1905 960,1905 1015,1960 v1(1415,1960) ; v1(1415,1915) 1418.62,1911.38 U1.102
  Bottom Layer w10: v1(1415,1915) v1(1415,1960)
PA11: R24.1 U1.103 | length 1263.7
  Top Layer w10: U1.103 1398.94,1781.06 1410,1770 v1(1935,1770) ; v1(2520,1815) 2520.59,1815.59 R24.1
  Bottom Layer w10: v1(1935,1770) 2475,1770 v1(2520,1815)
PA12: R25.1 U1.104 | length 1583.1
  Top Layer w10: U1.104 1379.25,1770.75 1398.88,1751.12 1953.88,1751.12 v1(1955,1750) ; R25.1 v1(2800,1710)
  Bottom Layer w10: v1(1955,1750) 1959,1754 2756,1754 v1(2800,1710)
PA13: SWD.1 U1.105 | length 373.8
  Top Layer w10: v1@1359.57,1799.57 U1.105
  Bottom Layer w10: SWD.1 1105,1875 1154.15,1825.85 1285.85,1825.85 1316.69,1795 v1(1355,1795)
PA14: SWD.2 U1.109 | length 149.8
  Top Layer w10: SWD.2 1154.49,1775 ; 1154.49,1774.49 U1.109
PB1: R21.1 U1.47 | length 1041.5
  Top Layer w10: U1.47 2227.36,1282.36 2245,1300 v1@2245,1880 ; v1(2400,1890) R21.1
  Bottom Layer w10: v1@2255,1890 v1(2400,1890)
  other v1: 2250,1885
PB8: R52.2 U1.139 | length 1743.5
  Top Layer w10: U1.139 1888.94,1183.94 v1(1890,1185) ; v1(2055,2000) R52.2@2234.41,2000
  Bottom Layer w10: v1(1890,1185) 1890,1852.25 2037.75,2000 v1(2055,2000)
PB9: U1.140
PB12: U1.73
PB13: R55.2 U1.74 | length 389.3
  Top Layer w10: v1(1735,1970) R55.2 ; U1.74 1969.8,1969.8 v1(1970,1970)
  Bottom Layer w10: v1(1735,1970) v1(1970,1970)
PB14: R53.2 U1.75 | length 160.5
  Top Layer w10: R53.2 1935,1950.12 1950.12,1935 U1.75
PB15: R54.2 U1.76 | length 223
  Top Layer w10: R54.2 1835,1970 1865,1940 1915,1940 1930.43,1924.57 U1.76
PC0: U1.26
PC1: U1.27
PC2: U1.28
PC3: U1.29
PC4: U1.44
PC5: R19.1 U1.45 | length 1217.6
  Top Layer w10: U1.45 2233.24,1242.99 2290.25,1300 2290.25,2024.75 v1(2290,2020) ; v1(2405,2020) 2410,2020 R19.1
  Bottom Layer w10: v1(2290,2020) v1(2405,2020)
PC6: U1.96
PC7: U1.97
PC8: U1.98
PC9: U1.99
PC10: R57.1 U1.111 串口4.1 | length 3260.8
  Top Layer w10: v1(660,1605) 1100,1605 1120,1625 1120,1715 1140.12,1735.12 U1.111 1744.88,1735.12 2000,1480 v1(2000,1445)
  Bottom Layer w10: 串口4.1 125,1990 190,1925 190,1675 260,1605 v1(660,1605) ; v1@1998.63,1448.63 v1@2000,1448.63 ; v1(2000,1445) 2405,1445 2415,1435 ; 2420,1440 2520,1340 2690,1340 2705,1355 R57.1
PC11: R58.1 U1.112 串口4.2 | length 3061.4
  Top Layer w10: v1(660,1575) 1092.63,1575 1145,1627.37 1145,1700 1160.43,1715.43 U1.112 1734.57,1715.43 v1(1980,1470)
  Bottom Layer w10: 串口4.2 135,1890 170,1855 170,1645 239,1576 659,1576 v1(660,1575) ; v1(1980,1470) 1985.37,1464.63 2420.37,1464.63 2500.59,1384.41 R58.1
PC12: U1.113
PC13: R33.1 U1.7 | length 1584.4
  Top Layer w10: v1(1325,720) 1325,865 1390,930 ; v1(1390,915) 1390,930 ; U1.7 1418.62,958.62 1390,930 ; v1(1915,720) 2010,720 2080,790 v1(2125,790) ; v1(2285,795) 2455,795 v1(2480,770)
  Bottom Layer w10: v1(1325,720) v1(1915,720) ; v1(2125,790) 2130,795 v1(2285,795) ; v1(2480,770) R33.1
PD0: U1.114
PD1: U1.115
PD2: U1.116
PD3: U1.117
PD4: U1.118
PD5: U1.119
PD6: R71.2 U1.122 | length 1837.3
  Top Layer w10: U1.122 1220.52,1517.86 1282.14,1517.86 1385,1415 v1(1985,1415)
  Bottom Layer w10: v1(1985,1415) 2422.37,1415 2519.87,1317.5 2815,1317.5 2890.59,1241.91 R71.2
PD7: U1.123
PD8: U1.77
PD9: U1.78
PD10: U1.79
PD11: U1.80
PD12: U1.81
PD13: U1.82
PD14: U1.85
PD15: U1.86
PE0: R35.1 R37.1 U1.141 | length 1588.6
  Top Layer w10: v1(220,805) R35.1 R37.1 ; v1(860,830) 955,925 v1(1329.14,925) ; U1.141 1329.57,1144.57 v1(1329.14,1145)
  Bottom Layer w10: v1(220,805) 835,805 v1(860,830) ; v1(1329.14,925) v1(1329.14,1145)
PE1: R36.1 R38.1 U1.142 | length 1261.9
  Top Layer w10: R36.1 R38.1 434.41,844.41 v1(435,845) ; v1(835,845) 845,845 945,945 v1(1300,945) ; U1.142 1299.88,1124.88 v1(1300,1125)
  Bottom Layer w10: v1(435,845) v1(835,845) ; v1(1300,945) v1(1300,1125)
PE2: U1.1
PE3: U1.2
PE4: U1.3
PE5: U1.4
PE6: U1.5
PE7: U1.58
PE8: U1.59
PE9: U1.60
PE10: U1.63
PE11: U1.64
PE12: U1.65
PE13: U1.66
PE14: U1.67
PE15: U1.68
PF0: U1.10
PF1: U1.11
PF2: U1.12
PF3: U1.13
PF4: U1.14
PF5: U1.15
PF6: U1.18
PF7: U1.19
PF8: U1.20
PF9: U1.21
PF10: U1.22
PF11: U1.49
PF12: U1.50
PF13: U1.53
PF14: U1.54
PF15: U1.55
PG0: U1.56
PG1: U1.57
PG2: U1.87
PG3: U1.88
PG4: U1.89
PG5: U1.90
PG6: U1.91
PG7: U1.92
PG8: U1.93
PG9: U1.124
PG10: U1.125
PG11: U1.126
PG12: U1.127
PG13: U1.128
PG14: U1.129
PG15: U1.132
R2IN: R63.1 U2.8 | length 363.7
  Top Layer w10: v1(365,380) U2.8
  Bottom Layer w10: R63.1 345,600 365,580 v1(365,380)
RESET: C21.2 R10.1 RESET.1 U1.25 | length 1163.8
  Top Layer w10: U1.25 1772.95,1062.95 v1(1780,1070) ; v1(2130,1040) 2225,1040 2325,940 v1(2375,940) ; R10.1 C21.2 2269.41,694.41 2285.95,710.94 RESET.1 ; RESET.1@2375,717.09 v1(2375,750)
  Bottom Layer w10: v1(1780,1070) 1925,1070 1955,1040 v1(2130,1040) ; v1(2375,750) v1(2375,940)
RIIN: U2.13
RXD_3403.3: Q4.2 R47.1 R48.1 R49.2 | length 200.2
  Top Layer w10: R49.2 R47.1 470,1875.59 470,1838.03 Q4.2 456.18,1810.59 R48.1
RXD_3405: Q4.3 R49.1 R50.1 U4.3 | length 855.2
  Top Layer w10: v1(305,1700) 305.59,1700.59 R50.1 310.6,1780 Q4.3 ; Q4.3@359.41,1791.22 R49.1
  Bottom Layer w10: v1(305,1700) 325,1680 510,1680 600,1770 600,1935 625,1960 U4.3
SCK2: R16.1 R17.2 U6.4 | length 302.6
  Top Layer w10: U6.4 636.61,1186.61 690,1240 R16.1 753.82,1279.41 R17.2
SCL_345: R24.2 R27.1 U5.14 | length 132.8
  Top Layer w10: R27.1 R24.2@2564.41,1765 ; U5.14 R24.2
SDA_345: R25.2 R28.1 U5.13 | length 149.8
  Top Layer w10: U5.13 2643.74,1683.74 2670,1710 R25.2 R28.1
SDI: R15.1 R18.2 U6.3 | length 325.4
  Top Layer w10: U6.3 v1@590,1212.21 ; v1@592.5,1212.5 630,1250 R15.1 ; v1(715,1215) 749.41,1215 R18.2
  Bottom Layer w10: v1(590,1215) v1(715,1215)
SDO: R13.2 TP1.1 U6.5 | length 152.9
  Top Layer w10: R13.2 434.85,1165 U6.5 TP1.1@456.46,1118.54
SDO_345: R29.2 U5.12 | length 76.7
  Top Layer w10: U5.12 R29.2@2697.18,1652.24
T1OUT: U2.14
T2OUT: R64.1 U2.7 | length 221.2
  Top Layer w10: v1(315,430) U2.7
  Bottom Layer w10: v1(315,430) 315,494.4 R64.1
TXD_3403.3: Q3.2 R43.1 R44.1 R46.2 | length 179.8
  Top Layer w10: R46.2 R43.1 Q3.2@454.41,2032.44 ; Q3.2 503.19,2027.4 R44.1
TXD_3405: Q3.3 R45.1 R46.1 U4.2 | length 681.3
  Top Layer w10: R45.1 Q3.3 370.63,2034.37 339.41,2065.59 R46.1 339.41,2139.41 v1(340,2140)
  Bottom Layer w10: v1(340,2140) 540,2140 567.5,2112.5 567.5,2042.5 600,2010 U4.2
VCC3.3: C3.2 C4.2 C5.2 C8.1 C9.1 C10.1 C11.1 C12.1 C13.1 C14.1 C15.1 C16.1 C17.1 C18.1 C19.2 C20.2 C24.2 C25.2 C26.1 C27.1 C32.1 C33.1 CN3.1 LD1.1 LD2.1 LD3.1 LED1.1 Q3.1 Q4.1 R10.2 R14.2 R15.2 R16.2 R26.2 R27.2 R28.2 R30.2 R44.2 R48.2 R61.1 R62.1 SW1.3 SW2.3 TVS1.2 U1.6 U1.17 U1.32 U1.33 U1.39 U1.52 U1.62 U1.72 U1.84 U1.95 U1.108 U1.121 U1.131 U1.144 U2.16 U3.2 U5.1 U6.6 U6.8 U8.2 U13.11 | length 13176.3
  Top Layer w10: C16.1 1121.1,1085.51 U1.144 1265.51,1085.51 v1(1280,1100) ; C15.1@1139.18,1341.42 U1.131 1221.22,1340 v1(1280,1340) ; U1.121 1273.27,1538.27 v1(1273.27,1536.73) ; v1(1300,1785) 1300,1854.69 U1.108 ; U1.6 1398.94,1068.94 v1(1400,1070) ; v1(1555,1790) 1556.42,1788.58 U1.95 1556.42,1921.42 1570,1935 1755,1935 1772.95,1917.05 U1.84 v1(1772.95,1792.05) 1990,1792.05 2007.56,1774.49 U1.72 C14.1@2153.9,1774.49 ; v1(1615,1070) 1615.47,1069.53 U1.17 ; C11.1@1910.75,906.35 U1.32 ; C12.1 1970,919.57 1930.43,959.14 U1.33 1930.43,1065.43 v1(1970,1105) 1990,1125 v1(2000,1125) 2000.12,1124.88 U1.39 C8.1@2159.29,1124.88 ; v1(2000,1380) 2069.41,1380 U1.52 C9.1@2148.61,1380.79 ; U1.62 C10.1@2152.05,1577.64 ; v1@2154.41,1665 v1@2154.41,1665.59
  Top Layer w20: v1(325,1485) C19.2 C20.2 418.82,1276.18 427.5,1267.5 ; v1(400,1740) 446.77,1740 Q4.1 493.18,1742.6 R48.2 570,1699.41 R14.2 R15.2 R16.2 784.41,1330.59 v1(785,1330) ; v1(400,1950) 402.6,1952.6 Q3.1 493.18,1952.6 R44.2 ; 420,1260 420,1225 432.79,1212.21 U6.6 ; 431.61,1263.39 U6.8 ; LED1.1 C25.2@852.61,260.99 ; U2.16 U2.16@700,730 ; v1(770,585) 769.41,585.59 C33.1 754.4,730 U2.16@700,730 ; C25.2 U8.2@989.2,256.58 ; U8.2 1150,417.38 R61.1 R62.1 ; C16.1 1120.59,1099.41 1075,1145 825,1145 790,1110 U3.2 790,820 U2.16@700,730 ; C11.1 C12.1 2160,905.59 ; C9.1 2154.41,1385 C10.1 v1@2154.41,1665 ; C14.1 2154.41,1665.59 v1(2155,1665) ; R10.2 2155,900.59 2160,905.59 ; CN3.1 2374.41,2170.59 v1(2374.41,1840) R26.2 2374.41,1465.59 2395,1445 R30.2 ; v1(2450,1840) 2449.41,1839.41 R27.2 2449.41,1700.59 2466.26,1683.74 U5.1 ; SW2.3 v1@2723.86,899.45 ; v1@2725,905.59 2160,905.59 ; LD1.1 LD2.1 LD3.1 2750.59,1879.41 R28.2 ; SW1.3 v1(3078.86,880)
  Bottom Layer w10: v1(1273.27,1536.73) 1317.68,1536.73 C3.2 ; v1(1280,1100) v1(1280,1340) 1319.41,1379.41 C3.2 ; v1(1300,1785) C4.2 ; v1(1400,1070) C18.1 1610,1114.41 C17.1 ; v1(1555,1790) C5.2 C4.2 ; v1(1615,1070) C17.1 ; v1(1772.95,1792.05) 1775,1790 C13.1 ; v1(1970,1105) 1955.59,1119.41 C17.1 ; v1(2000,1125) v1(2000,1380) ; C4.2 1265.59,1740.59 1255,1730 1255,1605 1319.41,1540.59 C3.2
  Bottom Layer w20: v1(325,1485) v1(570,1485) ; v1(400,1740) v1(400,1950) ; v1(770,260) v1(770,585) ; v1(785,1330) 785,1000.47 U3.2 ; v1(2155,1665) 2225,1665 2265.59,1624.41 C32.1@2265.59,1510.59 ; C32.1 C32.1@2265.59,1510.59 ; U13.11@2345.59,1510.59 C32.1@2265.59,1510.59 ; U13.11 2350,1595 2370,1615 v1(2375,1615) ; v1(2374.41,1840) v1(2450,1840) v1(2750,1840) ; v1(2425,905) 2425,745 2460,710 C27.1 ; v1(2725,905) 3070,905 3078.86,896.14 v1(3078.86,880) ; C26.1 2995,900
VIN: 12IN1.1 SW3.2 | length 622.2
  Top Layer w40: 12IN1.1 2592.4,575 2895,575 2960,510 2960,435 2895,370 SW3.2
VIN1: CIN1.1 CIN2.1 CIN3.2 DR1.1 RS1.1 SW3.3 U7.4 U9.4 | length 1449.9
  Top Layer w40: DR1.1 v1(2378.86,541.14) ; v1(2815,630) 2895,710 U7.4
  Bottom Layer w40: 2385,535 2385,565 2450,630 v1(2815,630) 2820,630 2950,500 2950,335 2906.26,291.26 SW3.3
  other v1: 2395,575
VUSB: C31.2 R45.2 R50.2 R51.1 U4.16 USB.A4B9 USB.A9B4 | length 2748.5
  Top Layer w20: R50.2 R45.2 ; v1(450,2119) 450,2145 470,2165 v1(560,2165) ; v1(620,2165) 622.35,2162.65 v1(622.35,1927.65) ; v1(625,1850) v1(865,1850) ; v1(815,2030) 851.78,2030 857.78,2036 952.21,2036 962.21,2026 1186,2026 1195.53,2035.53 USB.A9B4 ; USB.A4B9 1384.49,2025.51 v1(1385,2025)
  Bottom Layer w20: v1(255,1920) 310,1920 350.59,1960.59 R51.1 C31.2 U4.16 450,2081.81 v1(450,2119) ; v1@560,2163.87 781.13,2163.87 815,2130 v1(815,2030) ; v1(622.35,1927.65) 625,1925 v1(625,1850) ; v1(865,1850) 890,1850 1005,1965 1355,1965 1385,1995 v1(1385,2025)
pads on no net: CN3.4 RESET.2 RESET.4 SW1.2 SW1.4 SW2.2 SW2.4 SW3.1 SW3.4 SW3.5 SW3.6 U1.106 U2.11 U2.12 U3.3 U3.8 U3.9 U3.10 U4.9 U4.10 U4.11 U4.12 U4.13 U4.14 U4.15 U5.3 U5.10 U5.11 U9.8 U13.3 U13.6 U13.7 U13.8 U13.9 U13.10 U13.12 U13.13 U13.14 U13.15 U13.16 U13.17 U13.18 U13.19 U13.20 U13.21 U13.22 USB.A8 USB.B8

## Polygon pours and split planes (outlines as drawn)
GND on Top Layer "Bottom Layer-No Net" (solid, pour order 4): 0,0 0,2362.2 3149.61,2362.2 3149.61,2125 2880,2125 2880,1500 3149.61,1500 3149.61,669.61 3110,630 cw(c3061.72,678.28) 3061.72,610 2155,610 1926.42,610 cw(c1926.42,710) 1855.71,639.29 1855,640 ccw(c1794.64,579.64) 1794.64,665 1320,665 1296.42,665 ccw(c1296.42,565) 1225.71,635.71 1215,625 ccw(c1263.28,576.72) 1195,576.72 1195,250 1195,239.14 ccw(c1229.14,239.14) 1205,215 1205,120 1205,36.21 cw(c1153.79,36.21) 1190,0
GND on Bottom Layer "Bottom Layer-No Net" (solid, pour order 6): 0,0 0,2362.2 3149.61,2362.2 3149.61,2125 2880,2125 2880,1500 3149.61,1500 3149.61,0

## Keep-outs
Keep-Out Layer:
  lines w10: 3149.61,1500 2880,1500 2880,2125 3149.61,2125 ; 0,0 0,2362.2 3149.61,2362.2 3149.61,0 0,0

## Other copper
Top Layer:
  rectangle net 5V: 1235,595 1270,610
  rectangle net VIN1: 1780.48,560 1790,575.2
  rectangle net NetR2_2: 1765,235 1860,370
  region net GND: 1509.5,420.5 ccw(c1509.5,350.5) 1439.5,350.5 1440,270 1510,270 ccw(c1510,300) 1540,300 1542.07,367.93 cw(c1552.07,367.93) 1552.07,377.93 1640,380 ccw(c1640,390) 1650,390 1652.32,397.32 ccw(c1627.32,397.32) 1627.32,422.32
  region net VIN1: 2330,590 2335,585 2352.93,589.71 2375,590 2420,585 cw(c2420,570) 2435,570 2435,500 cw(c2420.39,500) 2420.39,485.38 2325.87,485.38
  region net GND: 1440,50 cw(c1430,50) 1430,40 ccw(c1440,40) 1440,30 2660,30 ccw(c2660,130) 2760,130 2760,150 ccw(c2760,220) 2830,220 2830,515 ccw(c2800,515) 2800,545 2710,545 ccw(c2710,515) 2680,515 2680,470 cw(c2610,470) 2610,400 2390,400 cw(c2390,440) 2350,440 ccw(c2330,440) 2330,460 2050,460 cw(c2050,465) 2045,465 2045,470 2015,465 1988.54,471.46 ccw(c1988.54,466.46) 1983.54,466.46 1985,355 ccw(c2040,355) 2040,300 cw(c2040,285) 2055,285 2055,205 cw(c1990,205) 1990,140 1770,140 cw(c1770,165) 1745,165 1745,280 ccw(c1730,280) 1730,295 1440,295
  region net 5V: 1239.9,600 cw(c1249.9,600) 1249.9,610 1349.9,610 cw(c1349.9,590) 1369.9,590 1369.9,160 ccw(c1384.9,160) 1384.9,145 cw(c1384.9,110) 1419.9,110 1419.9,40 cw(c1409.9,40) 1409.9,30 1264.9,30 cw(c1264.9,55) 1239.9,55 cw(c1239.9,80) 1214.9,80 1214.9,595 cw(c1229.9,595) 1229.9,610 1249.9,610
  region net VIN1: 1790,575 ccw(c1790,565) 1780,565 1780,500 cw(c1775,500) 1775,495 ccw(c1785,495) 1785,485 1870,485 cw(c1870,470) 1885,470 1965,470 cw(c1980,470) 1980,485 2320,485 ccw(c2320,530) 2365,530 2365,575 ccw(c2350,575) 2350,590 1805,590 ccw(c1805,565) 1780,565
  region net NetRS1_2: 1775,390 ccw(c1780,390) 1780,385 1860,385 cw(c1860,370) 1875,370 1875,360 ccw(c1880,360) 1880,355 ccw(c1890,355) 1890,345 1955,345 ccw(c1955,365) 1975,365 1975,445 ccw(c1965,445) 1965,455 1880,455 cw(c1880,465) 1870,465 ccw(c1860,465) 1860,475 1775,475
  region net NetL1_1: 1450,565 cw(c1462.07,565) 1453.54,573.54 1465,585 cw(c1501.21,548.79) 1501.21,600 1745,600 cw(c1745,590) 1755,590 1754.39,360.61 cw(c1739.39,360.61) 1739.39,345.61 1668.54,348.54 cw(c1668.54,353.54) 1663.54,353.54 1660,435 1655,430 1455,430 1445,500

## Text inside footprints (layer, text, board x,y; h text height)
U3: Top Overlay "MD0" at 350,965 h30 r90; Top Overlay "MD1" at 450,970 h30 r90; Top Overlay "RXD" at 550,965 h30 r90; Top Overlay "TXD" at 650,965 h30 r90; Top Overlay "AUX" at 750,965 h30 r90; Top Overlay "VCC" at 850,970 h30 r90; Top Overlay "GND" at 975,970 h30 r91
U10: Top Overlay "232" at 95,480 h60 r90; Top Overlay "CAN" at 1100,455 h60 r90